# Altium PCB PCB1.PcbDoc
Units mil, origin at the board's own origin, x right, y up, seen from the top; angles counter-clockwise.
Board outline 3890.02 x 2525.03 mil, 2 copper layers (Top Layer, Bottom Layer); 36 components, 50 nets, 282 pads, 24 vias.
Unrouted connection lines stored in the file: 4.
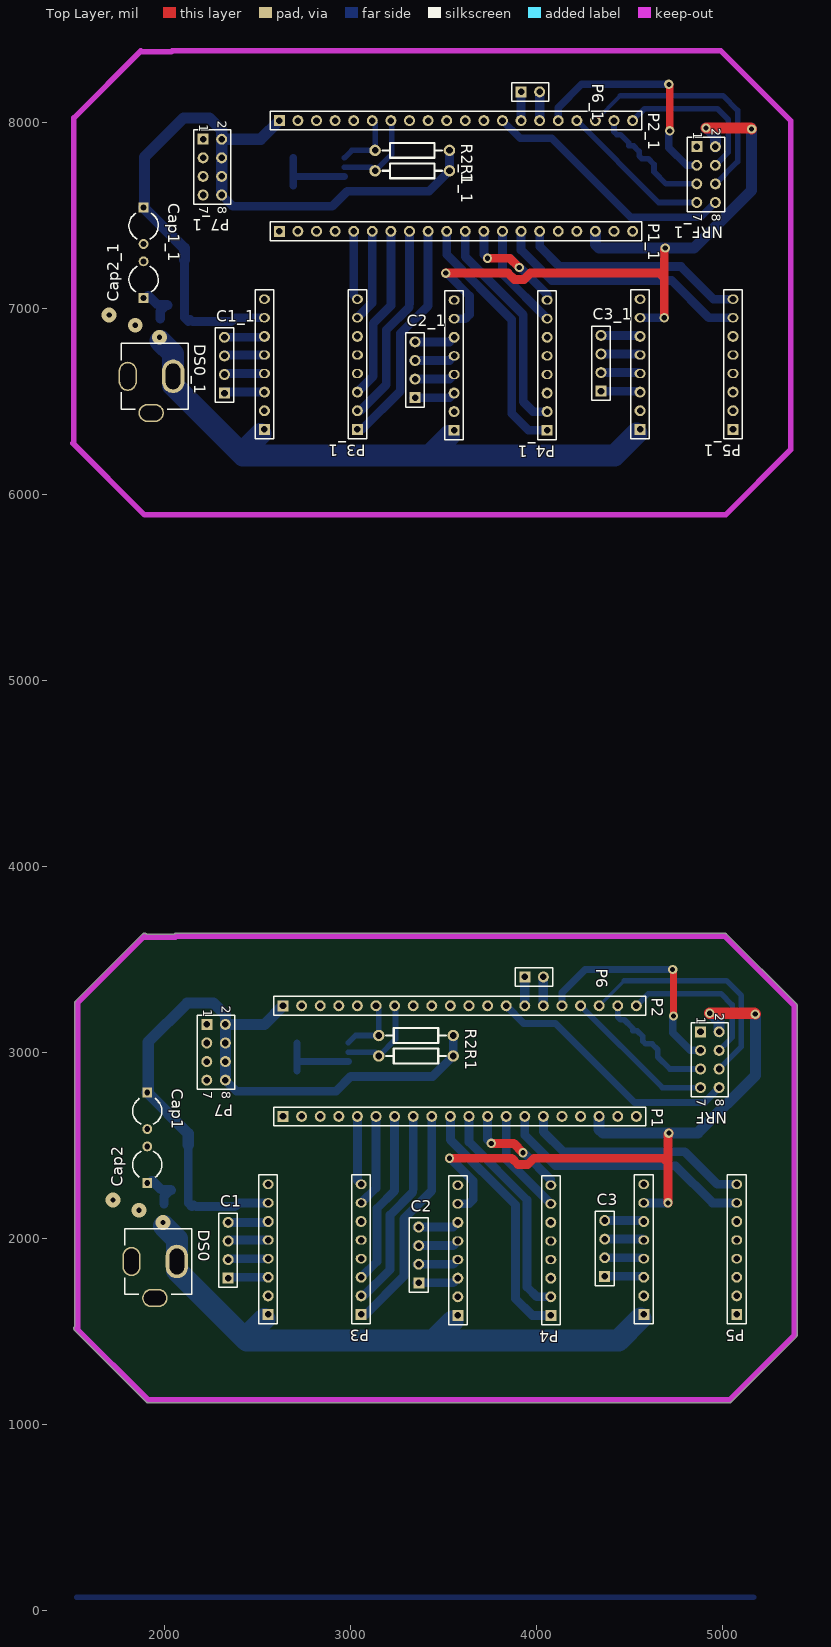
[diagram p0: Top Layer view]
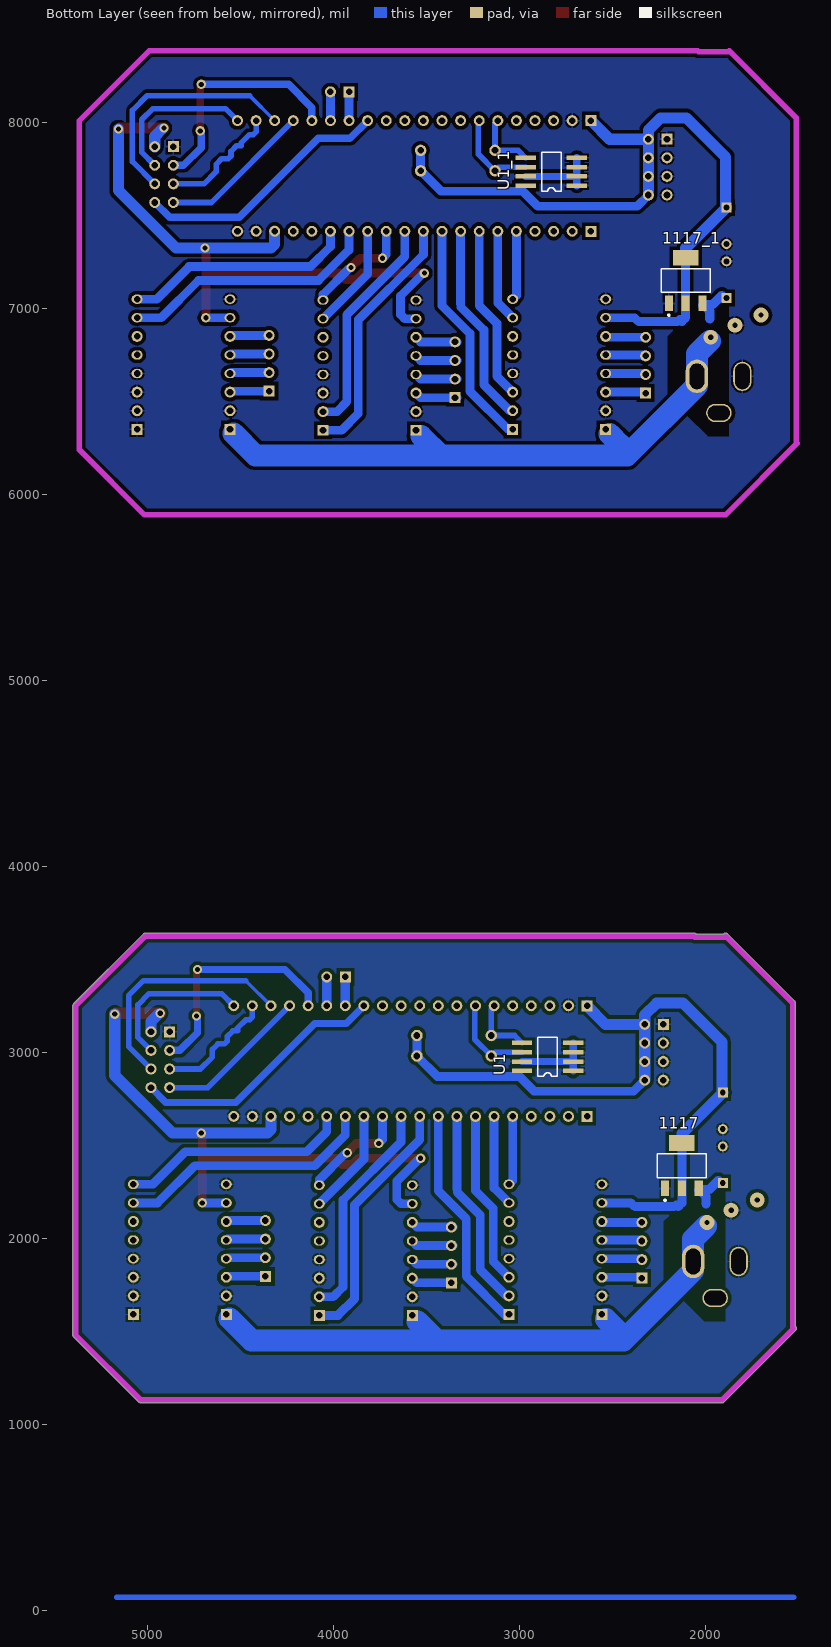
[diagram p1: Bottom Layer view, seen from below]

## Layer stack, top to bottom
Top Solder: solder mask 0.4, Solder Resist, Dk 3.5
Top Layer: signal copper 1.4
Dielectric 1: dielectric 12.6, FR-4, Dk 4.8
Bottom Layer: signal copper 1.4
Bottom Solder: solder mask 0.4, Solder Resist, Dk 3.5

## Board outline
1514.38,1504.38 cw(c1525,1515) 1514.98,1526.19 1514.98,3265 cw(c1530,3265) 1519.4,3275.63 1519.38,3275.62 1879.38,3635.62 cw(c1890,3625) 1901.19,3635.01 2048.81,3635.01 cw(c2060,3625) 2060,3640.01 5010,3640.01 cw(c5010,3625) 5020.63,3635.6 5020.62,3635.62 5395.62,3260.62 5395.6,3260.63 cw(c5385,3250) 5400.02,3250 5400.02,1480 cw(c5385,1480) 5395.6,1469.37 5395.62,1469.38 5045.62,1119.38 5045.63,1119.4 cw(c5035,1130) 5035,1114.98 1910,1114.98 cw(c1910,1130) 1899.37,1119.4 1899.38,1119.38

## Design rules (kind name [scope] priority, off if disabled: settings)
Clearance [All] p1: gap=10
PolygonConnect [All] p1: connectstyle=Relief reliefconductorwidth=10 reliefentries=4 polygonreliefangle="90 Angle" airgapwidth=10
RoutingVias [All] p1: holewidth=28 width=50 viastyle="Through Hole" minholewidth=28 minwidth=50 maxholewidth=28 maxwidth=50
SolderMaskExpansion [All] p1: expansion=4
Width [All] p1: maxlimit=118.11 minlimit=19.68 preferedwidth=47.24
30 further rules are at their usual default settings.

## Classes and differential pairs
component class Sheet1: 1117 C1 C2 C3 Cap1 Cap2 DS0 NRF P1 P2 P3 P4 P5 P6 P7 R1 R2 U1

## Components (designator, comment, footprint, x,y, rotation, side; value= is the part's Value field where it differs from the comment)
1117 "Header 4" SOT-223 2125,2390 r180 bottom
1117_1 "Header 4" SOT-223 2105,7150 r180 bottom (schematic designator 1117)
C1 "Header 4" HDR1X4 2340,1785 r90 top
C1_1 "Header 4" HDR1X4 2320,6545 r90 top (schematic designator C1)
C2 "Header 4" HDR1X4 3365,1760 r90 top
C2_1 "Header 4" HDR1X4 3345,6520 r90 top (schematic designator C2)
C3 "Header 4" HDR1X4 4365,1795 r90 top
C3_1 "Header 4" HDR1X4 4345,6555 r90 top (schematic designator C3)
Cap1 "Cap2" CAPR5-4X5 1905,2685 r270 top
Cap1_1 "Cap2" CAPR5-4X5 1885,7445 r270 top (schematic designator Cap1)
Cap2 "Cap2" CAPR5-4X5 1905,2395 r90 top
Cap2_1 "Cap2" CAPR5-4X5 1885,7155 r90 top (schematic designator Cap2)
DS0 "BATTERY" 9V 2064.37,1875 r270 top
DS0_1 "BATTERY" 9V 2044.37,6635 r270 top (schematic designator DS0)
NRF "Header 4X2" HDR2X4 4880,3110 r270 top
NRF_1 "Header 4X2" HDR2X4 4860,7870 r270 top (schematic designator NRF)
P1 "Header 20" HDR1X20 2635,2655 r0 top
P1_1 "Header 20" HDR1X20 2615,7415 r0 top (schematic designator P1)
P2 "Header 20" HDR1X20 2635,3250 r0 top
P2_1 "Header 20" HDR1X20 2615,8010 r0 top (schematic designator P2)
P3 "Header 8X2A" PCBComponent_1 3109,2349 r180 top
P3_1 "Header 8X2A" PCBComponent_1 3089,7109 r180 top (schematic designator P3)
P4 "Header 8X2A" PCBComponent_1 4129,2344 r180 top
P4_1 "Header 8X2A" PCBComponent_1 4109,7104 r180 top (schematic designator P4)
P5 "Header 8X2A" PCBComponent_1 5129,2349 r180 top
P5_1 "Header 8X2A" PCBComponent_1 5109,7109 r180 top (schematic designator P5)
P6 "Header 2" HDR1X2 3935,3405 r0 top
P6_1 "Header 2" HDR1X2 3915,8165 r0 top (schematic designator P6)
P7 "Header 4X2" HDR2X4 2225,3150 r270 top
P7_1 "Header 4X2" HDR2X4 2205,7910 r270 top (schematic designator P7)
R1 "Res2" R1/4 3150,2980 r0 top
R1_1 "Res2" R1/4 3130,7740 r0 top (schematic designator R1)
R2 "Res2" R1/4 3150,3090 r0 top
R2_1 "Res2" R1/4 3130,7850 r0 top (schematic designator R2)
U1 "AT24C02" SOIC8P 2730,2900 r90 bottom
U1_1 "AT24C02" SOIC8P 2710,7660 r90 bottom (schematic designator U1)

## Footprints (in the part's own frame and the unit in brackets; to place one, negate y for a bottom-side part, rotate by r counter-clockwise, add the part's x,y. Pads: shape width x height; smd on the part's side, far side on the other; paste and mask are expansions set on the pad)
9V [mm]
  oval 4x2.5 hole 2 slot 3.5 at 0 deg: 1(0,-6.207)
  oval 4.584x3.059 hole 2 slot 3.5 at 0 deg: 2(0,-0.007)
  oval 2.5x3.5 hole 2 slot 3 at 90 deg: 3(5,-3.007)
  silkscreen extent -4.5,-7.11 4.5,2.03, body extent -4.38,-13.84 5.14,0.76, height 10.92
CAPR5-4X5 [mm] "Capacitor; 2 Leads"
  rect 1.35x1.35 hole 0.8: 1(-2.5,0)
  round 1.35 hole 0.8: 2(2.5,0)
  silkscreen extent -1.69,-2 1.82,2
HDR1X2 [mm] "Connector; Header; 2 Position"
  rect 1.5x1.5 hole 0.9: 1(0,0)
  round 1.5 hole 0.9: 2(2.54,0)
  silkscreen extent -1.27,-1.27 3.81,1.27
HDR1X4 [mm] "Connector; Header; 4 Position"
  rect 1.5x1.5 hole 0.9: 1(0,0)
  round 1.5 hole 0.9: 2(2.54,0) 3(5.08,0) 4(7.62,0)
  silkscreen extent -1.27,-1.27 8.89,1.27
HDR1X20 [mm] "Connector; Header; 20 Position"
  rect 1.5x1.5 hole 0.9: 1(0,0)
  round 1.5 hole 0.9: 2(2.54,0) 3(5.08,0) 4(7.62,0) 5(10.16,0) 6(12.7,0) 7(15.24,0) 8(17.78,0) 9(20.32,0) 10(22.86,0) 11(25.4,0) 12(27.94,0) 13(30.48,0) 14(33.02,0) 15(35.56,0) 16(38.1,0) 17(40.64,0) 18(43.18,0) 19(45.72,0) 20(48.26,0)
  silkscreen extent -1.27,-1.27 49.53,1.27
HDR2X4 [mm] "Connector; Header; 4x2 Position"
  rect 1.5x1.5 hole 0.9: 1(0,0)
  round 1.5 hole 0.9: 2(0,2.54) 3(2.54,0) 4(2.54,2.54) 5(5.08,0) 6(5.08,2.54) 7(7.62,0) 8(7.62,2.54)
  silkscreen extent -1.27,-1.27 8.89,3.81
PCBComponent_1 [mm]
  rect 1.5x1.5 hole 0.9: 1(1.372,19.279) 9(14.072,19.279)
  round 1.5 hole 0.9: 2(1.372,16.739) 3(1.372,14.199) 6(1.372,6.579) 10(14.072,16.739) 11(14.072,14.199) 14(14.072,6.579)
  oval 1.5x1.27 hole 0.9: 4(1.372,11.659) 5(1.372,9.119) 7(1.372,4.039) 8(1.372,1.499) 12(14.072,11.659) 13(14.072,9.119) 15(14.072,4.039) 16(14.072,1.499)
  silkscreen extent 0.1,0.23 15.34,20.55, body extent 0.1,0.23 15.21,20.55, height 0.7
R1/4 [mil]
  round 62 hole 35.43: 1(0,0) 2(400,0)
  silkscreen extent 40,-40 360,40
SOIC8P [mil]
  rect 24x110 smd: 1(0,-20) 2(50,-20) 3(100,-20) 4(150,-20) 5(150,255) 6(100,255) 7(50,255) 8(0,255)
  silkscreen extent -30,65 180,170, body extent -24,-4 174,234, height 63
SOT-223 [mm] "SOT-223/SC-73; 4 Leads; Body 6.7 x 7.3 mm, inc. leads (LxW max)"
  rect 1.1x2.15 smd: 1(-2.3,-3.1) 2(0,-3.1) 3(2.3,-3.1)
  rect 3.5x2.15 smd: 4(0,3.1)
  silkscreen extent -3.35,-4.85 3.35,1.63, body extent -3.25,-3.58 3.25,3.38, height 1.65

## Part data
1117 1117_1 C1 C1_1 C2 C2_1 C3 C3_1: "Header, 4-Pin"
Cap1 Cap1_1 Cap2 Cap2_1: "Capacitor"
NRF NRF_1 P7 P7_1: "Header, 4-Pin, Dual row"
P1 P1_1 P2 P2_1: "Header, 20-Pin"
P3 P3_1 P4 P4_1 P5 P5_1: "Header, 8-Pin, Dual row"
P6 P6_1: "Header, 2-Pin"
R1 R1_1 R2 R2_1: "Resistor"
U1 U1_1: "EEROM存储器"

## Via types
v1: diameter 50, hole 28, Top Layer to Bottom Layer, 18 vias
v2: diameter 80, hole 28, Top Layer to Bottom Layer, 6 vias

## Nets (pads, with @x,y where several pads share a name; then routed paths per layer and width w, separated by ;. In a path a pad name is that pad's centre, name@x,y a point inside that pad or via, vN(x,y) a via of type N, cw(c..) or ccw(c..) an arc to the next point about the centre after c; other vN are vias at no path point)
3V3: 1117.2 1117.4 Cap1.1 NRF.2 P1.18 P2.1 P3.15 P4.15 P5.15 P7.2 P7.4 P7.6 P7.8 R1.2 R2.2 U1.8 | length 7842.7
  Top Layer w47.24: v1(3530,2430) 3865.02,2430 3898.65,2396.38 3951.35,2396.38 3984.98,2430 4680,2430 4705,2405 ; v1(4705,2190) 4705,2405 ; v1(4710,2565) 4705,2560 4705,2405
  Top Layer w60: v1(4930,3210) 5170,3210 v1(5175,3205)
  Bottom Layer w47.24: 1117.4@2125,2502.05 1117.2 2125,2190 2145,2170 2155,2180 ; 2170,2170 2375.08,2170 ; P7.8 2385,2790 2920,2790 3000,2870 3440,2870 R1.2 R2.2 ; 2385.04,2174.96 2400.08,2190 P3.15 ; v1@3540,2425 3658.03,2306.97 3658.03,2208.03 3635,2185 P4.15 ; P5.15 v1@4690,2190
  Bottom Layer w60: Cap1.1 2125,2563.43 1117.4 1117.4@2125,2502.05 ; Cap1.1@1910,2788.43 1910,3055 2120,3265 2260,3265 2325,3200 P7.2 ; P7.8 P7.6 P7.4 P7.2 ; P2.1 2535,3150 P7.2 ; P1.18 4335,2585 4355,2565 v1(4710,2565) 4865,2565 5175,2875 v1(5175,3205) ; v1@4940,3205 4980,3165 NRF.2
5V: P2.3
20V: 1117.3 Cap2.1 DS0.2 P3.9 P4.9 P5.9 | length 3412.4
  Bottom Layer w50: Cap2.1@1930,2310 1978.43,2261.57 2030.83,2261.57 1117.3@2034.45,2257.95 ; 1995,2185 1995,2225 1117.3@2030,2260
  Bottom Layer w118.11: v2@1995,2065 2064.09,1995.91 DS0.2 2064.09,1825.91 2440,1450 3443.58,1450 ; 2473.58,1505 P3.9@2534.29,1565.71 ; 3546.79,1553.21 3443.58,1450 ; P5.9@4556.79,1568.21 4438.58,1450 3443.58,1450
  other v2: 1990,2085
DIRX: P1.5 P3.8 | length 373.3
  Bottom Layer w47.24: P1.5 3035,2310 P3.8
DIRY: P1.12 P4.8 | length 550.8
  Top Layer w47.24: v1(3755,2510) 3875,2510 v1(3925,2460)
  Bottom Layer w47.24: P1.12 3735,2530 v1@3745,2520 ; v1@3940,2450 4075,2315 P4.8
DIRZ: P1.15 P5.8 | length 1239.2
  Bottom Layer w47.24: P1.15 4035,2573.03 4143.03,2465 4795,2465 4970,2290 P5.8
GND: 1117.1 Cap1.2 Cap2.2 DS0.1 NRF.1 P1.19 P1.20 P2.2 P3.4 P3.10 P3.16 P4.3 P4.4 P4.10 P4.16 P5.1 P5.2 P5.3 P5.4 P5.10 P5.16 P7.1 P7.3 P7.5 P7.7 U1.1 U1.2 U1.3 U1.4 U1.7 | length 425
  Bottom Layer w39.37: U1.1 U1.2 ; U1.4 U1.3 U1.2 ; U1.7 U1.2
  other v2: 1860,2150
NetC1_1: C1.1 P3.11 | length 215
  Bottom Layer w47.24: C1.1@2340,1790 P3.11
NetC1_2: C1.2 P3.12 | length 215
  Bottom Layer w47.24: C1.2@2340,1890 P3.12
NetC1_3: C1.3 P3.13 | length 215
  Bottom Layer w47.24: C1.3@2340,1990 P3.13
NetC1_4: C1.4 P3.14 | length 215
  Bottom Layer w47.24: C1.4@2345,2085 P3.14@2560,2085
NetC2_1: C2.1 P4.11 | length 230.4
  Bottom Layer w47.24: C2.1@3355,1760 C2.1 3550,1760 P4.11
NetC2_2: C2.2 P4.12 | length 230.4
  Bottom Layer w47.24: C2.2@3355,1860 C2.2 3550,1860 P4.12
NetC2_3: C2.3 P4.13 | length 230.4
  Bottom Layer w47.24: C2.3@3355,1960 C2.3 3550,1960 P4.13
NetC2_4: C2.4 P4.14 | length 230.4
  Bottom Layer w47.24: C2.4@3355,2060 C2.4 3550,2060 P4.14
NetC3_1: C3.1 P5.11 | length 212.1
  Bottom Layer w47.24: C3.1 4570,1795 P5.11
NetC3_2: C3.2 P5.12 | length 212.1
  Bottom Layer w47.24: C3.2 4570,1895 P5.12
NetC3_3: C3.3 P5.13 | length 212.1
  Bottom Layer w47.24: C3.3 4570,1995 P5.13
NetC3_4: C3.4 P5.14 | length 212.1
  Bottom Layer w47.24: C3.4 4570,2095 P5.14
NRF_CE: NRF.3 P2.16 | length 1238.2
  Top Layer w39.37: v1(4730,3445) 4735,3440 v1(4735,3195)
  Bottom Layer w39.37: P2.16 4135,3320 4260,3445 v1(4730,3445) ; v1@4730,3185 4730,3105 4825,3010 NRF.3
NRF_CSN: NRF.4 P2.20 | length 841
  Bottom Layer w30: P2.20 4600,3315 4990,3315 5050.31,3254.68 5050.31,3080.32 NRF.4
NRF_IRQ: NRF.8 P2.13 | length 1393.5
  Bottom Layer w39.37: P2.13 3930,3155 4100,3155 4525,2730 4900,2730 NRF.8
NRF_MISO: NRF.7 P2.17 | length 827.3
  Bottom Layer w30: P2.17 4675,2810 NRF.7
NRF_MOSI: NRF.6 P2.18 | length 1298.8
  Bottom Layer w19.68: P2.18 4470,3385
  Bottom Layer w30: 4470,3385 5020,3385 5100,3305 5100,3030 NRF.6
NRF_SCK: NRF.5 P2.19 | length 667.8
  Bottom Layer w30: P2.19 4435,3190 4450,3175 4470,3175 4515,3130 4515,3115 4540,3115 4570,3085 4570,3060 4585,3045 4620,3045 4650,3015 4650,2975 4715,2910 NRF.5
NRST: P1.17
PA1: P1.6 P3.7 | length 498.1
  Bottom Layer w47.24: P3.7 3135,2270 P1.6
PA2: P1.7 P3.3 | length 939.6
  Bottom Layer w47.24: P3.3 3140,1875 3140,2160 3235,2255 P1.7
PA3: P1.8 P3.2 | length 1071.1
  Bottom Layer w47.24: P3.2 3070,1690 3210,1830 3210,2124.4 3332.8,2247.2 ; 3335,2265 P1.8
PA4: P1.9 P3.1 | length 1237
  Bottom Layer w47.24: P3.1 3080,1590 3285,1795 3285,2105 3435,2255 P1.9
PA5: P1.10 P4.1 | length 1352.3
  Bottom Layer w47.24: P1.10 3535,2530 3885,2180 3885,1675 3975,1585 P4.1
PA6: P1.11 P4.2 | length 1196.2
  Bottom Layer w47.24: P1.11 3635,2518.03 3947.24,2205.78 3947.24,1737.76 4000,1685 P4.2
PA9: P2.15 P6.2 | length 155
  Bottom Layer w50: P2.15 P6.2
PA10: P2.14 P6.1 | length 155
  Bottom Layer w50: P2.14 P6.1
PA12: P2.12
PA15: P2.11
PB0: P1.13 P4.7 | length 569.4
  Bottom Layer w47.24: P1.13 3835,2425 P4.7
PB1: P1.14 P5.7 | length 1391.2
  Bottom Layer w47.24: P1.14 3935,2555 4100,2390 4745,2390 4945,2190 P5.7
PB3: P2.10
PB4: P2.9
PB5: P2.8
PB6: P2.7 R1.1 U1.6 | length 482.6
  Bottom Layer w30: U1.6 3130,3000 R1.1 3240,3070 3240,3245 P2.7
PB7: P2.6 R2.1 U1.5 | length 347.8
  Bottom Layer w30: U1.5 3025,3090 R2.1 3150,3235 P2.6
PB8: P2.5
PB9: P2.4
PB11: P1.16
PC13: P1.2
PC14: P1.3
PC15: P1.4
VBAT: P1.1
pads on no net: 1117_1.1 1117_1.2 1117_1.3 1117_1.4 C1_1.1 C1_1.2 C1_1.3 C1_1.4 C2_1.1 C2_1.2 C2_1.3 C2_1.4 C3_1.1 C3_1.2 C3_1.3 C3_1.4 Cap1_1.1 Cap1_1.2 Cap2_1.1 Cap2_1.2 DS0.3 DS0_1.1 DS0_1.2 DS0_1.3 NRF_1.1 NRF_1.2 NRF_1.3 NRF_1.4 NRF_1.5 NRF_1.6 NRF_1.7 NRF_1.8 P1_1.1 P1_1.2 P1_1.3 P1_1.4 P1_1.5 P1_1.6 P1_1.7 P1_1.8 P1_1.9 P1_1.10 P1_1.11 P1_1.12 P1_1.13 P1_1.14 P1_1.15 P1_1.16 P1_1.17 P1_1.18 P1_1.19 P1_1.20 P2_1.1 P2_1.2 P2_1.3 P2_1.4 P2_1.5 P2_1.6 P2_1.7 P2_1.8 P2_1.9 P2_1.10 P2_1.11 P2_1.12 P2_1.13 P2_1.14 P2_1.15 P2_1.16 P2_1.17 P2_1.18 P2_1.19 P2_1.20 P3.5 P3.6 P3_1.1 P3_1.2 P3_1.3 P3_1.4 P3_1.5 P3_1.6 P3_1.7 P3_1.8 P3_1.9 P3_1.10 P3_1.11 P3_1.12 P3_1.13 P3_1.14 P3_1.15 P3_1.16 P4.5 P4.6 P4_1.1 P4_1.2 P4_1.3 P4_1.4 P4_1.5 P4_1.6 P4_1.7 P4_1.8 P4_1.9 P4_1.10 P4_1.11 P4_1.12 P4_1.13 P4_1.14 P4_1.15 P4_1.16 P5.5 P5.6 P5_1.1 P5_1.2 P5_1.3 P5_1.4 P5_1.5 P5_1.6 P5_1.7 P5_1.8 P5_1.9 P5_1.10 P5_1.11 P5_1.12 P5_1.13 P5_1.14 P5_1.15 P5_1.16 P6_1.1 P6_1.2 P7_1.1 P7_1.2 P7_1.3 P7_1.4 P7_1.5 P7_1.6 P7_1.7 P7_1.8 R1_1.1 R1_1.2 R2_1.1 R2_1.2 U1_1.1 U1_1.2 U1_1.3 U1_1.4 U1_1.5 U1_1.6 U1_1.7 U1_1.8
copper on no net: | length 35775
  Top Layer w39.37: v1(4710,8205) 4715,8200 v1(4715,7955)
  Top Layer w47.24: v1(3510,7190) 3845.02,7190 3878.65,7156.38 3931.35,7156.38 3964.98,7190 4660,7190 4685,7165 ; v1(3735,7270) 3855,7270 v1(3905,7220) ; v1(4685,6950) 4685,7165 ; v1(4690,7325) 4685,7320 4685,7165
  Top Layer w60: v1(4910,7970) 5150,7970 v1(5155,7965)
  Bottom Layer w19.68: 4315,8010 4450,8145
  Bottom Layer w30: 1525,70 5165,70 ; 2965,7760 3110,7760 3130,7740 3220,7830 3220,8005 3215,8010 ; 2965,7810 3005,7850 3130,7850 3130,7995 3115,8010 ; 4215,8010 4655,7570 4860,7570 ; 4415,8010 4415,7950 4430,7935 4450,7935 4495,7890 4495,7875 4520,7875 4550,7845 4550,7820 4565,7805 4600,7805 4630,7775 4630,7735 4695,7670 4860,7670 ; 4450,8145 5000,8145 5080,8065 5080,7790 4960,7670 ; 4515,8010 4580,8075 4970,8075 5030.31,8014.69 5030.31,7840.31 4960,7770
  Bottom Layer w39.37: 2690,7660 2690,7710 ; 2690,7810 2690,7760 2690,7710 ; 2965,7710 2690,7710 ; 3815,8010 3910,7915 4080,7915 4505,7490 4880,7490 4960,7570 ; 4115,8010 4115,8080 4240,8205 v1(4710,8205) ; v1@4710,7945 4710,7865 4805,7770 4860,7770
  Bottom Layer w47.24: 2105,7262.05 2105,7027.95 2105,6950 2125,6930 2135,6940 ; 2150,6930 2355.08,6930 ; 2305,7610 2365,7550 2900,7550 2980,7630 3420,7630 3530,7740 3530,7850 ; 2320,6550 2535,6550 ; 2320,6650 2535,6650 ; 2320,6750 2535,6750 ; 2325,6845 2540,6845 ; 2365.04,6934.96 2380.08,6950 2535,6950 ; 3015,7415 3015,7070 3035,7050 ; 3035,6350 3060,6350 3265,6555 3265,6865 3415,7015 3415,7415 ; 3035,6450 3050,6450 3190,6590 3190,6884.4 3312.8,7007.2 ; 3035,6550 3120,6635 3120,6920 3215,7015 3215,7415 ; 3035,6950 3115,7030 3115,7415 ; 3315,7025 3315,7415 ; 3335,6520 3345,6520 3530,6520 3555,6545 ; 3335,6620 3345,6620 3530,6620 3555,6645 ; 3335,6720 3345,6720 3530,6720 3555,6745 ; 3335,6820 3345,6820 3530,6820 3555,6845 ; 3515,7415 3515,7290 3865,6940 3865,6435 3955,6345 4055,6345 ; v1@3520,7185 3638.03,7066.97 3638.03,6968.03 3615,6945 3555,6945 ; 3615,7415 3615,7278.03 3927.24,6965.78 3927.24,6497.76 3980,6445 4055,6445 ; 3715,7415 3715,7290 v1@3725,7280 ; 3815,7415 3815,7185 4055,6945 ; 3915,7415 3915,7315 4080,7150 4725,7150 4925,6950 5055,6950 ; v1@3920,7210 4055,7075 4055,7045 ; 4015,7415 4015,7333.03 4123.03,7225 4775,7225 4950,7050 5055,7050 ; 4345,6555 4550,6555 4555,6550 ; 4345,6655 4550,6655 4555,6650 ; 4345,6755 4550,6755 4555,6750 ; 4345,6855 4550,6855 4555,6850 ; 4555,6950 v1@4670,6950
  Bottom Layer w50: 1910,7070 1958.43,7021.57 2010.83,7021.57 2014.45,7017.95 ; 1975,6945 1975,6985 2010,7020 ; 3915,8010 3915,8165 ; 4015,8010 4015,8165
  Bottom Layer w60: 1885,7543.43 2105,7323.43 2105,7272.05 2105,7262.05 ; 1890,7548.43 1890,7815 2100,8025 2240,8025 2305,7960 2305,7910 ; 2305,7610 2305,7710 2305,7810 2305,7910 ; 2615,8010 2515,7910 2305,7910 ; 4315,7415 4315,7345 4335,7325 v1(4690,7325) 4845,7325 5155,7635 v1(5155,7965) ; v1@4920,7965 4960,7925 4960,7870
  Bottom Layer w118.11: v2@1975,6825 2044.09,6755.91 2044.09,6635 2044.09,6585.91 2420,6210 3423.58,6210 ; 2453.58,6265 2514.29,6325.71 ; 3526.79,6313.21 3423.58,6210 ; 4536.79,6328.21 4418.58,6210 3423.58,6210
  other v2: 1720,2205 1970,6845 1840,6910 1700,6965

## Polygon pours and split planes (outlines as drawn)
GND on Bottom Layer "GND_L02_P008" (solid, remove dead copper, pour order 8): 1910,1130 1890,1150 1890,2970 1890,3625 1530,3265 1530,1510 1515,1495 1880,1130 1895,1130
no net on Bottom Layer "NONET_L02_P014" (solid, remove dead copper, pour order 14): 1870,8385 1870,7245 1755,7130 1880,7005 2090,7005 2090,6965 2185,6870 2205,6850 2205,6640 2205,6530 1990,6315 1985,6310 1870,6310 1870,5910 1890,5890 1905,5905 5030,5905 5360,6235 5365,6240 5365,7995 5365,8010 4990,8385
no net on Bottom Layer "NONET_L02_P012" (solid, remove dead copper, pour order 12): 1890,5890 1870,5910 1870,7730 1870,8385 1510,8025 1510,6270 1495,6255 1860,5890 1875,5890
GND on Bottom Layer "GND_L02_P010" (solid, remove dead copper, pour order 10): 1890,3625 1890,2485 1775,2370 1900,2245 2110,2245 2110,2205 2205,2110 2225,2090 2225,1880 2225,1770 2010,1555 2005,1550 1890,1550 1890,1150 1910,1130 1925,1145 5050,1145 5380,1475 5385,1480 5385,3235 5385,3250 5010,3625

## Keep-outs
Keep-Out Layer:
  lines w30: 1505,6275 1890,5890 5015,5890 5365,6240 5365,6450 5365,8010 4990,8385 2040,8385 ; 1510,6280 1510,8025 1870,8385 ; 1525,1515 1910,1130 5035,1130 5385,1480 5385,1690 5385,3250 5010,3625 2060,3625 ; 1530,1520 1530,3265 1890,3625 ; 1865,8380 2035,8380 ; 1885,3620 2055,3620

## Text inside footprints (layer, text, board x,y; h text height)
NRF: Top Overlay "8" at 4960,2750 h50 r270; Top Overlay "7" at 4860,2750 h50 r270; Top Overlay "1" at 4860,3190 h50 r270; Top Overlay "2" at 4960,3210 h50 r270
NRF_1: Top Overlay "8" at 4940,7510 h50 r270; Top Overlay "7" at 4840,7510 h50 r270; Top Overlay "1" at 4840,7950 h50 r270; Top Overlay "2" at 4940,7970 h50 r270
P7: Top Overlay "8" at 2305,2790 h50 r270; Top Overlay "7" at 2205,2790 h50 r270; Top Overlay "1" at 2205,3230 h50 r270; Top Overlay "2" at 2305,3250 h50 r270
P7_1: Top Overlay "8" at 2285,7550 h50 r270; Top Overlay "7" at 2185,7550 h50 r270; Top Overlay "1" at 2185,7990 h50 r270; Top Overlay "2" at 2285,8010 h50 r270